# EAGLE board Smart home (EAGLE 9.7.0)

Size 185.7 x 134.65 mm. Coordinates in mm from the lower left corner, seen from the top.
Outline: 0,0 185.7,0 185.7,134.65 0,134.65 0,0
Copper layers (1*16): Top 0.035mm / dielectric 1.5mm / Bottom 0.035mm
Design rules "default": minimum track width 6mil, minimum drill 0.35mm, track to track 6mil, track to pad 6mil, pad to pad 6mil, via to via 6mil, smd to smd 6mil, copper to edge 40mil, drill to drill 6mil, minimum pad ring 10mil, minimum via ring 8mil, stop-mask expansion 4mil, vias tented up to drill 0mil, thermal gap 10mil

## Footprints (pad centres in the part's own frame; a part is rotated, then mirrored left to right if it is on the bottom)
LEDRD254W60D565H860B_O = drill 0.981 pad 1.581: 1 -1.27,0; 2 1.27,0
MQ-XX-SOCKET = drill 1.27: 1 -6.223,6.223; 2 -8.788,0; 3 -6.223,-6.223; 4 6.223,-6.223; 5 8.788,0; 6 6.223,6.223
1X02 = drill 1.016 long: 1 -1.27,0; 2 1.27,0
MOTOR = drill 1.118 pad 3.15 octagon: + 2.54,0; - -2.54,0
PIEZO = drill 1 pad 1.6: 1 -3.5,0; 2 3.5,0
28027 = drill 1.016 long: 1 -2.54,0; 2 0,0; 3 2.54,0
GL5528 = drill 0.8 pad 1.4: 1 -1.702,0; 2 1.702,0
RESAD1016W63L850D250B = drill 0.83 pad 1.43: 1 -5.08,0; 2 5.08,0
SWITCH-MOMENTARY-PTH-6.5MM = drill 1.016 pad 1.88: 1 -3.251,2.261; 2 3.251,2.261; 3 -3.251,-2.261; 4 3.251,-2.261
ARDUINO-UNO-R3-SHIELD = drill 1.016 pad 1.88: 3.3V 24.13,-2.54; 5V 24.13,0; A0 24.13,12.7; A1 24.13,15.24; A2 24.13,17.78; A3 24.13,20.32; A4 24.13,22.86; A5 24.13,25.4; AREF -24.13,-13.97; D2 -24.13,20.32; D3 -24.13,17.78; D4 -24.13,15.24; D5 -24.13,12.7; D6 -24.13,10.16; D7 -24.13,7.62; D8 -24.13,3.81; D9 -24.13,1.27; D10 -24.13,-1.27; D11 -24.13,-3.81; D12 -24.13,-6.35; D13 -24.13,-8.89; GND@0 24.13,2.54; GND@1 24.13,5.08; GND@2 -24.13,-11.43; IOREF 24.13,-7.62; NC 24.13,-10.16; RES 24.13,-5.08; RX -24.13,25.4; SCL -24.13,-19.05; SDA -24.13,-16.51; TX -24.13,22.86; VIN 24.13,7.62

## Placement (x,y rotation side)
D2  ORANGE  [LEDRD254W60D565H860B_O]  120.09,101.46 180 top
GAS1  GAS-SENSORMQ-XX-SOCKET  [MQ-XX-SOCKET]  120.46,120.43 180 top
L1  LIGHTBULB  [1X02]  84.81,105.08 0 top
M1  MOTOR_HDR  [MOTOR]  96.09,16.89 180 top
PIEZO1  PIEZO  [PIEZO]  55.47,107.65 0 top
PIR1  PIR-SENSOR_28027  [28027]  164.75,6.35 180 top
R1  PHOTOCELL_GL5528  [GL5528]  117.79,53.58 0 top
R3  10k  [RESAD1016W63L850D250B]  116.52,40.88 90 top
R4  1k  [RESAD1016W63L850D250B]  121.36,96.38 90 top
R5  10k  [RESAD1016W63L850D250B]  131.76,56.12 90 top
R6  4.7k  [RESAD1016W63L850D250B]  139.61,102.57 90 top
S1  SWITCH_MOMENTARY  [SWITCH-MOMENTARY-PTH-6.5MM]  134.3,67.55 90 top
U1  ARDUINO-UNO-R3-SHIELD  [ARDUINO-UNO-R3-SHIELD]  47.88,58.64 270 top

## Library data of the parts
D2 = Tinkercad; CATEGORY: Opto-Electronic; SUB-CATEGORY: LED; VALUE: LED_ORANGE
GAS1 L1 M1 PIEZO1 PIR1 R1 R3-R6 S1 U1 = Tinkercad

## Nets
D2_A: D2.1 R4.2
U1_5V: GAS1.4 GAS1.5 GAS1.6 PIR1.2 R1.2 R5.1 U1.5V
U1_A0: R1.1 R3.2 U1.A0
U1_A1: GAS1.1 GAS1.3 R6.2 U1.A1
U1_D3: PIR1.1 U1.D3
U1_D4: R5.2 S1.1 S1.2 U1.D4
U1_D5: M1.+ U1.D5
U1_D7: R4.1 U1.D7
U1_D8: L1.1 U1.D8
U1_D9: PIEZO1.1 U1.D9
U1_GND: D2.2 GAS1.2 L1.2 M1.- PIEZO1.2 PIR1.3 R3.1 R6.1 S1.3 S1.4 U1.GND@0 U1.GND@1 U1.GND@2

## Tracks (layer width: path | path; a pad name or v marks a point on that pad's centre or on a via)
D2_A  (1 unrouted)
U1_5V  (6 unrouted)
U1_A0  (2 unrouted)
U1_A1  (3 unrouted)
U1_D3  (1 unrouted)
U1_D4  (3 unrouted)
U1_D5  (1 unrouted)
U1_D7  (1 unrouted)
U1_D8  (1 unrouted)
U1_D9  (1 unrouted)
U1_GND  (12 unrouted)